# Allegro board CN0522 Allegro Layout File.brd
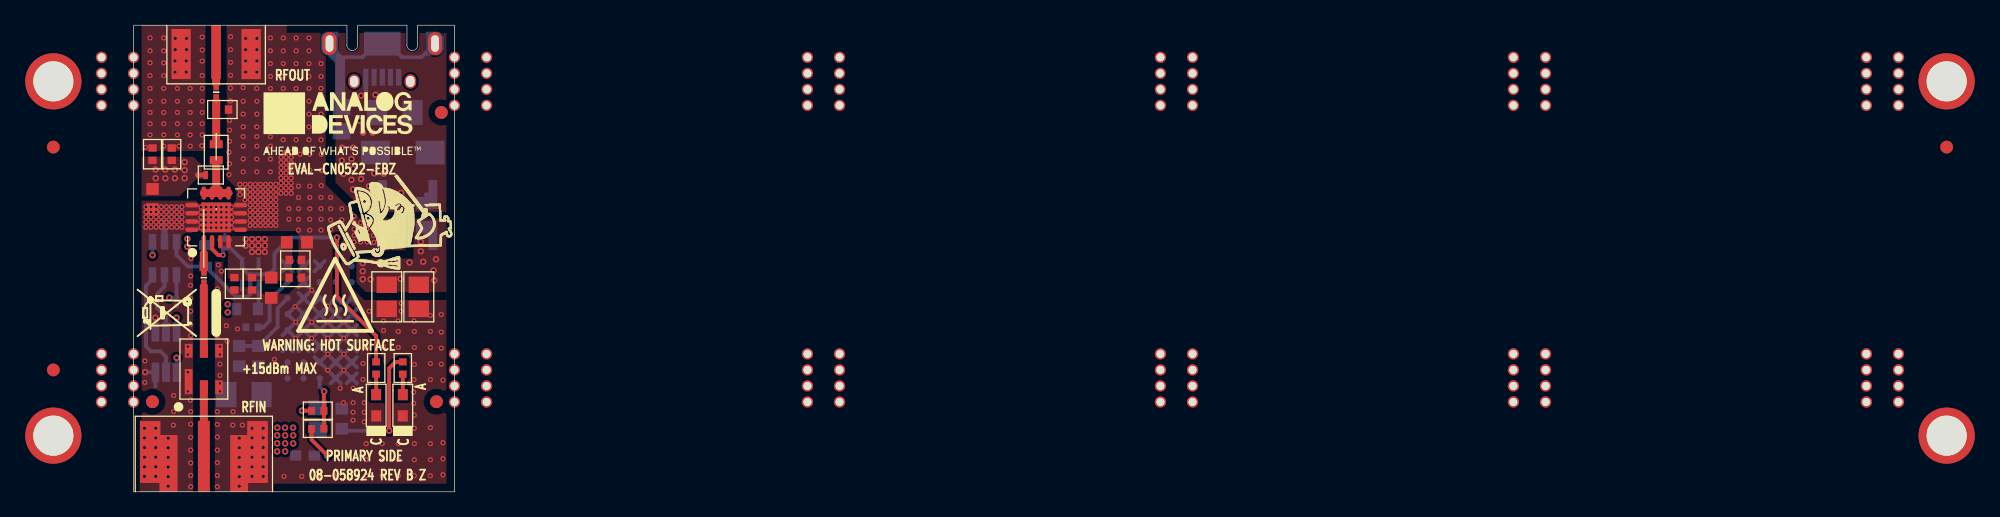
[diagram p0: board, top side]
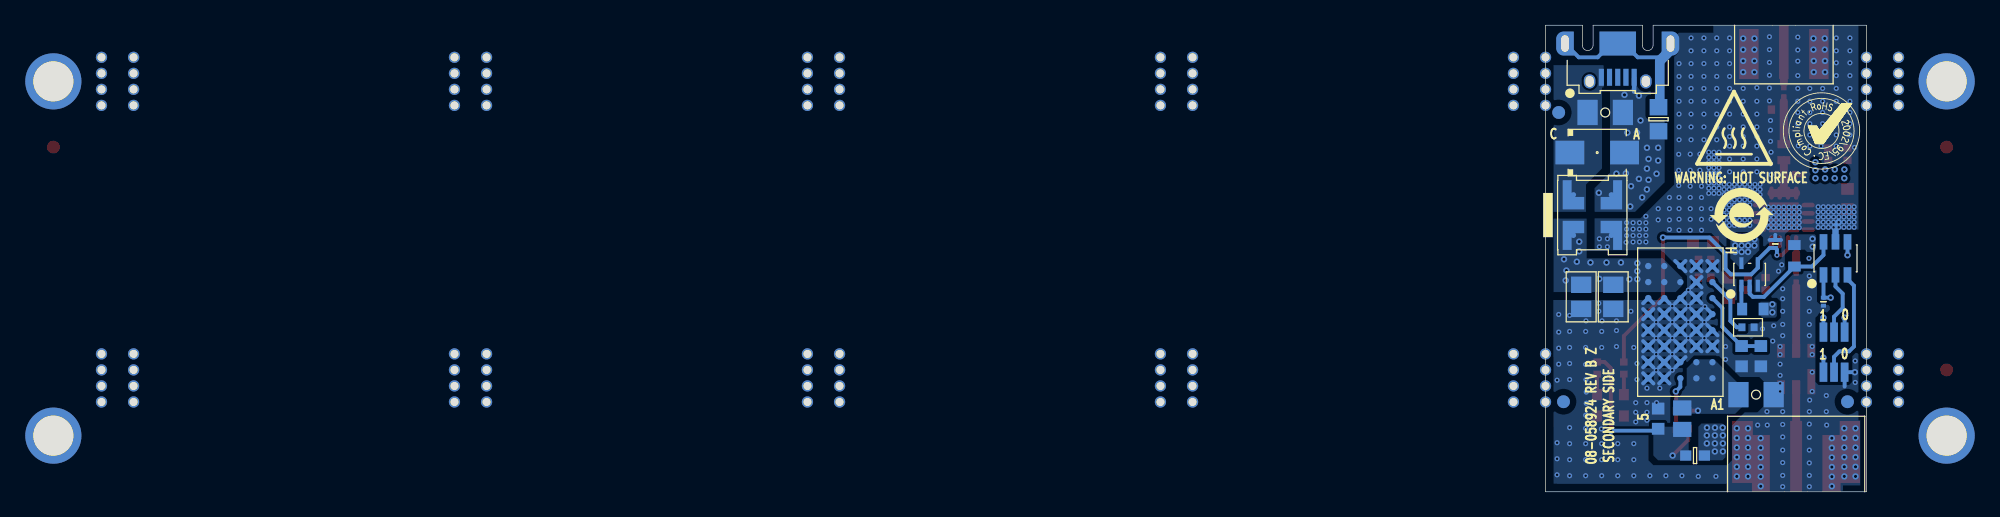
[diagram p1: board, bottom side, seen from below]

Outline 25.4 x 36.96 mm; copper layers: TOP, L2_GND, L3_GND, L4_PWR, L5_GND, BOTTOM. Coordinates in mm from the lower left corner of the outline.
Outline path: 0,36.96 16.88,36.96 16.88,35.38 arc(17.31,34.96) 17.74,35.38 17.74,36.96 21.63,36.96 21.63,35.38 arc(22.06,34.96) 22.49,35.38 22.49,36.96 25.4,36.96 25.4,0 0,0 0,36.96

## Design rules (mm)
constraint set DEFAULT: min track width 0.203

## Placement (name value [footprint] x y rotation side)
C1  100pF  [C0201]  5.56 16.96 90 top
C2  10uF  [C0603]  10.9 16.16 270 top
C3  0.01UF  [C0402]  9.37 16.47 270 top
C4  100pF  [C0402]  7.98 16.47 270 top
C5  10pF  [C0201]  7.21 19.63 90 bottom
C6  10uF  [C0603]  12.93 19.76 0 top
C7  0.01UF  [C0402]  12.8 18.36 0 top
C8  100pF  [C0402]  12.8 16.96 0 top
C9  100pF  [C0402]  3.02 26.74 90 top
C10  0.01UF  [C0402]  1.5 26.74 90 top
C11  10uF  [C0603]  1.5 23.19 270 top
C12  8PF  [C0402]  7.03 30.28 0 top
C13  100pF  [C0201]  6.54 31.65 90 top
C14  0.1uF  [C0201]  3.4 15.06 270 bottom
C15  47UF  [C1206H71]  20.68 30.05 180 bottom
C16  0.1UF  [C0805H53]  20.04 15.44 270 top
C17  0.1UF  [C0805H53]  22.58 15.44 270 top
C18  0.1UF  [C0805H53]  22.58 15.44 270 bottom
C19  4.7UF  [C0805H53]  20.04 15.44 270 bottom
C20  1UF  [C0603]  9.88 10.74 270 bottom
C21  1UF  [C0603]  8.36 10.74 270 bottom
C22  100uF  [C1206H71]  8.74 7.69 180 bottom
C23  1UF  [C0603]  16.48 5.79 90 bottom
D1  SMAJ5.0A-13-F  [DIOSMJ5_0]  21.31 26.87 180 bottom
DS1  SML-D12U1WT86  [LED0603_A]  19.2 6.85 90 top
DS2  LTST-C191KGKT  [LED0603_A]  21.31 6.85 90 top
E1  600OHM AT 100MEGHZ  [L0603]  13.56 2.87 180 bottom
FL1  915MEGHZ  [DCC6C]  5.56 9.73 0 top
J1  132365-10  [CNSMARAL686W375H177]  5.56 0 270 top
J2  CON-SMA-EDGE-S  [CNSMARAL525W250H148]  6.53 36.96 90 top
JP1  3PIN_SOLDER_JUMPER  [JPRSLD03]  2.57 9.47 0 bottom
JP2  3PIN_SOLDER_JUMPER  [JPRSLD03]  2.57 12.65 180 bottom
L1  18nH  [L0402-2]  6.12 25.09 180 top
L2  1.6nH  [L7144]  6.54 26.9 90 top
L3  800OHMS AT 100MEGHZ  [L2020_A]  21.69 21.92 270 bottom
L4  1uH  [L0805]  14.58 5.79 270 bottom
NOREF  -  [unnamed]  81.28 30.61 0 top
NOREF#2  -  [#2]  52.32 200.91 90 top
NOREF#3  -  [unnamed]  27.94 31.88 0 top
NOREF#4  -  [unnamed]  53.34 7.11 0 top
NOREF#5  -  [#2]  26.92 237.87 0 top
NOREF#6  -  [#2]  53.34 0 0 top
NOREF#7  -  [unnamed]  111.76 7.11 0 top
NOREF#8  -  [#2]  43.81 237.87 0 top
NOREF#9  -  [unnamed]  55.88 34.42 0 top
NOREF#10  -  [unnamed#2]  -6.35 27.3 0 top
NOREF#11  -  [#2]  -85.24 -81.42 0 top
NOREF#12  -  [unnamed]  109.22 30.61 0 top
NOREF#13  -  [unnamed]  139.7 10.92 0 top
NOREF#14  -  [#2]  16.2 29.14 0 top
NOREF#15  -  [unnamed]  -2.54 33.15 0 top
NOREF#16  -  [unnamed]  137.16 31.88 0 top
NOREF#17  -  [#2]  43.39 234.31 0 top
NOREF#18  -  [unnamed]  0 30.61 0 top
NOREF#19  -  [#2]  49.41 237.87 0 top
NOREF#20  -  [#2]  -69.38 316.18 0 top
NOREF#21  -  [unnamed]  25.4 30.61 0 top
NOREF#22  -  [unnamed]  0 34.42 0 top
NOREF#23  -  [unnamed]  109.22 7.11 0 top
NOREF#24  -  [#2]  -6.35 4.45 0 top
NOREF#25  -  [unnamed]  81.28 9.65 0 top
NOREF#26  -  [#2]  -10.16 0 0 top
NOREF#27  -  [unnamed]  25.4 33.15 0 top
NOREF#28  -  [unnamed#2]  23.98 7.13 0 top
NOREF#29  -  [unnamed]  -2.54 31.88 0 top
NOREF#30  -  [unnamed]  -2.54 9.65 0 top
NOREF#31  -  [unnamed]  -6.35 4.45 0 top
NOREF#32  -  [unnamed]  27.94 10.92 0 top
NOREF#33  -  [#2]  52.32 200.91 0 top
NOREF#34  -  [#2]  44.66 237.87 0 top
NOREF#35  -  [unnamed]  137.16 7.11 0 top
NOREF#36  -  [#2]  207.17 225.23 90 top
NOREF#37  -  [unnamed]  53.34 33.15 0 top
NOREF#38  -  [unnamed]  53.34 8.38 0 top
NOREF#39  -  [#2]  28.42 208.05 0 top
NOREF#40  -  [unnamed]  81.28 10.92 0 top
NOREF#41  -  [unnamed]  0 7.11 0 top
NOREF#42  -  [#2]  0 0 0 top
NOREF#43  -  [#2]  25.4 0 0 top
NOREF#44  -  [#2]  203.49 231.15 90 top
NOREF#45  -  [unnamed]  0 10.92 0 top
NOREF#46  -  [unnamed]  27.94 34.42 0 top
NOREF#47  -  [unnamed]  53.34 34.42 0 top
NOREF#48  -  [unnamed]  109.22 34.42 0 top
NOREF#49  -  [unnamed]  81.28 34.42 0 top
NOREF#50  -  [unnamed]  27.94 9.65 0 top
NOREF#51  -  [#2]  198.77 195.59 90 top
NOREF#52  -  [unnamed]  137.16 10.92 0 top
NOREF#53  -  [unnamed]  139.7 34.42 0 top
NOREF#54  -  [unnamed]  -2.54 10.92 0 top
NOREF#55  -  [#2]  147.32 0 0 top
NOREF#56  -  [#2]  18.41 36.96 180 top
NOREF#57  -  [unnamed]  55.88 9.65 0 top
NOREF#58  -  [unnamed#3]  -6.35 32.51 0 top
NOREF#59  -  [unnamed]  139.7 30.61 0 top
NOREF#60  -  [#2]  1.22 27.55 0 top
NOREF#61  -  [unnamed]  137.16 9.65 0 top
NOREF#62  -  [unnamed]  83.82 10.92 0 top
NOREF#63  -  [unnamed]  83.82 9.65 0 top
NOREF#64  -  [unnamed]  109.22 9.65 0 top
NOREF#65  -  [#2]  0 0 0 top
NOREF#66  -  [#2]  190.11 225.26 0 top
NOREF#67  -  [unnamed]  137.16 33.15 0 top
NOREF#68  -  [unnamed]  83.82 30.61 0 top
NOREF#69  -  [#2]  211.92 193.93 0 top
NOREF#70  -  [unnamed]  139.7 31.88 0 top
NOREF#71  -  [unnamed]  55.88 10.92 0 top
NOREF#72  -  [#2]  -2.54 0 0 top
NOREF#73  -  [#2]  18.41 0 90 top
NOREF#74  -  [unnamed]  111.76 31.88 0 top
NOREF#75  -  [unnamed#2]  -6.35 9.65 0 top
NOREF#76  -  [unnamed#2]  143.51 27.3 0 top
NOREF#77  -  [unnamed]  83.82 34.42 0 top
NOREF#78  -  [#2]  83.82 0 0 top
NOREF#79  -  [unnamed]  0 8.38 0 top
NOREF#80  -  [unnamed]  0 33.15 0 top
NOREF#81  -  [unnamed]  111.76 34.42 0 top
NOREF#82  -  [unnamed]  83.82 8.38 0 top
NOREF#83  -  [unnamed]  25.4 34.42 0 top
NOREF#84  -  [unnamed]  111.76 30.61 0 top
NOREF#85  -  [unnamed]  139.7 9.65 0 top
NOREF#86  -  [unnamed]  25.4 8.38 0 top
NOREF#87  -  [unnamed]  25.4 7.11 0 top
NOREF#88  -  [unnamed]  139.7 33.15 0 top
NOREF#89  -  [#2]  -10.16 36.96 0 top
NOREF#90  -  [#2]  55.88 0 0 top
NOREF#91  -  [unnamed]  109.22 33.15 0 top
NOREF#92  -  [#2]  26.92 200.91 0 top
NOREF#93  -  [unnamed]  139.7 7.11 0 top
NOREF#94  -  [#2]  26.92 237.87 0 top
NOREF#95  -  [unnamed]  109.22 8.38 0 top
NOREF#96  -  [#2]  81.28 0 0 top
NOREF#97  -  [unnamed]  55.88 30.61 0 top
NOREF#98  -  [#2]  -10.16 0 0 top
NOREF#99  -  [#2]  139.7 0 0 top
NOREF#100  -  [unnamed#2]  24.36 30.05 0 top
NOREF#101  -  [#2]  190.11 184.7 0 top
NOREF#102  -  [unnamed]  27.94 8.38 0 top
NOREF#103  -  [unnamed]  55.88 8.38 0 top
NOREF#104  -  [unnamed]  81.28 33.15 0 top
NOREF#105  -  [#2]  -26.51 208.38 0 top
NOREF#106  -  [unnamed]  109.22 10.92 0 top
NOREF#107  -  [#2]  26.92 200.91 0 top
NOREF#108  -  [unnamed]  111.76 8.38 0 top
NOREF#109  -  [#2]  0 36.96 270 top
NOREF#110  -  [unnamed]  53.34 10.92 0 top
NOREF#111  -  [unnamed]  25.4 10.92 0 top
NOREF#112  -  [unnamed]  27.94 7.11 0 top
NOREF#113  -  [unnamed]  83.82 7.11 0 top
NOREF#114  -  [#2]  15.34 52.02 0 top
NOREF#115  -  [unnamed]  -2.54 34.42 0 top
NOREF#116  -  [unnamed]  81.28 31.88 0 top
NOREF#117  -  [#2]  137.16 0 0 top
NOREF#118  -  [unnamed]  55.88 31.88 0 top
NOREF#119  -  [#2]  6.86 13.97 90 top
NOREF#120  -  [unnamed]  111.76 9.65 0 top
NOREF#121  -  [unnamed]  55.88 33.15 0 top
NOREF#122  -  [unnamed]  0 9.65 0 top
NOREF#123  -  [#2]  194.67 114.19 0 top
NOREF#124  -  [#2]  -85.24 -81.42 0 top
NOREF#125  -  [unnamed]  55.88 7.11 0 top
NOREF#126  -  [unnamed#3]  143.51 32.51 0 top
NOREF#127  -  [unnamed]  53.34 9.65 0 top
NOREF#128  -  [unnamed]  27.94 33.15 0 top
NOREF#129  -  [unnamed]  25.4 31.88 0 top
NOREF#130  -  [unnamed]  81.28 8.38 0 top
NOREF#131  -  [#2]  28.42 208.05 0 top
NOREF#132  -  [#2]  -85.24 -81.42 0 top
NOREF#133  -  [unnamed]  111.76 10.92 0 top
NOREF#134  -  [unnamed]  53.34 30.61 0 top
NOREF#135  -  [unnamed]  83.82 31.88 0 top
NOREF#136  -  [unnamed]  137.16 34.42 0 top
NOREF#137  -  [#2]  27.94 0 0 top
NOREF#138  -  [unnamed]  0 31.88 0 top
NOREF#139  -  [unnamed]  137.16 30.61 0 top
NOREF#140  -  [unnamed]  111.76 33.15 0 top
NOREF#141  -  [unnamed]  81.28 7.11 0 top
NOREF#142  -  [unnamed]  109.22 31.88 0 top
NOREF#143  -  [#2]  109.22 0 0 top
NOREF#144  -  [unnamed]  27.94 30.61 0 top
NOREF#145  -  [unnamed]  -2.54 8.38 0 top
NOREF#146  -  [unnamed#2]  1.5 7.13 0 top
NOREF#147  -  [#2]  -3.73 90.19 0 top
NOREF#148  -  [#2]  -6.35 4.45 0 top
NOREF#149  -  [unnamed]  139.7 8.38 0 top
NOREF#150  -  [unnamed]  -2.54 7.11 0 top
NOREF#151  -  [unnamed]  25.4 9.65 0 top
NOREF#152  -  [unnamed#3]  143.51 4.45 0 top
NOREF#153  -  [#2]  111.76 0 0 top
NOREF#154  -  [unnamed]  83.82 33.15 0 top
NOREF#155  -  [unnamed]  -2.54 30.61 0 top
NOREF#156  -  [#2]  201.13 227.54 0 top
NOREF#157  -  [#2]  48.56 237.87 0 top
NOREF#158  -  [unnamed]  53.34 31.88 0 top
NOREF#159  -  [unnamed]  137.16 8.38 0 top
NOREF#160  -  [#2]  201.13 213.37 0 top
NOREF#161  -  [unnamed#2]  24.36 30.05 180 bottom
NOREF#162  -  [#2]  9.88 21.92 180 bottom
NOREF#163  -  [unnamed#2]  23.98 7.13 180 bottom
NOREF#164  -  [unnamed#2]  1.5 7.13 180 bottom
P1  47590-0001  [CNMOLEX47590-0001]  19.69 36.96 270 bottom
R1  1K  [R0603]  5.7 18.69 270 bottom
R2  0  [R0603]  8.99 14.47 0 bottom
R3  365  [R0402]  19.2 9.8 270 top
R4  1K  [R0805]  16.46 29.51 270 bottom
R5  115K  [R0402]  9.37 13.03 180 bottom
R6  60.4K  [R0402]  14.58 6.42 180 top
R7  182K  [R0402]  14.58 4.99 180 top
R8  301  [R0402]  21.31 9.8 270 top
U1  ADL5605ACPZ  [QFN16_4X4_PAD2_36X2_36]  6.54 21.74 0 top
U2  ADT6402SRJZ  [TSOT23_6]  2.45 18.49 180 bottom
U3  74AHCT1G126SE-7  [SOT353]  9.25 17.22 180 bottom
U4  LTM8045MPY#PBF  [BGA40]  14.73 13.43 90 bottom

## Library data of the parts
C1 C13 = CAP: Tolerance: 5; User Part Number: UPN; alternate symbols: (); part number: CAP_SM-100PF,50V,5,E023045,C0201; tolerance: 5
C2 C6 C11 = CAP: User Part Number: UPN; Tolerance: 20; alternate symbols: (); part number: CAP_SM-10UF,6.3V,20,E007143,C0603; tolerance: 20
C3 C7 C10 = CAP: Tolerance: 10; User Part Number: UPN; alternate symbols: (); part number: CAP_SM-0.01UF,25V,10,E007203,C0402; tolerance: 10
C4 C8 C9 = CAP: Tolerance: 5; User Part Number: UPN; alternate symbols: (); part number: CAP_SM-100PF,50V,5,E024302,C0402; tolerance: 5
C5 = CAP: Tolerance: 5; User Part Number: UPN; alternate symbols: (C0201NC); part number: CAP_SM-10PF,25V,5,E022849,C0201; tolerance: 5
C12 = CAP: Tolerance: 0.5PF; User Part Number: UPN; alternate symbols: (); part number: CAP_SM-8PF,16V,0.5PF,E026830,C0402; tolerance: 0.5PF
C14 = CAP: Tolerance: 10; User Part Number: UPN; alternate symbols: (); part number: CAP_SM-0.1UF,6.3V,10,E011567,C0201; tolerance: 10
C15 = CAP: Tolerance: 20; User Part Number: UPN; alternate symbols: (); part number: CAP_SM-47UF,10V,20,E028092,C1206H71; tolerance: 20
C16-C18 = CAP: Tolerance: 10; User Part Number: UPN; alternate symbols: (); part number: CAP_SM-0.1UF,50V,10,E033336,C0805H53; tolerance: 10
C19 = CAP: Tolerance: 10; User Part Number: UPN; alternate symbols: (); part number: CAP_SM-4.7UF,25V,10,E025752,C0805H53; tolerance: 10
C20 C21 C23 = CAP: User Part Number: UPN; Tolerance: 10; alternate symbols: C0603L_ALT; part number: CAP_SM-1UF,25V,10,E033832,C0603; tolerance: 10
C22 = CAP: Tolerance: 20; User Part Number: UPN; alternate symbols: (); part number: CAP_SM-100UF,6.3V,20,E016591,C1206H71; tolerance: 20
D1 = DIO: Tolerance: N/A; User Part Number: UPN; alternate symbols: (); part number: DIO_SM-SMAJ5.0A-13-F,5V,N/A,E001108,DIOSMJ5_0; tolerance: N/A
DS1 = DIOLED: User Part Number: UPN; Tolerance: N/A; alternate symbols: (); part number: DIOLED_SM-SML-D12U1WT86,2.2V,N/A,E037111,LED0603_A; tolerance: N/A
DS2 = DIOLED: User Part Number: UPN; Tolerance: N/A; alternate symbols: (); part number: DIOLED_SM-LTST-C191KGKT,2V,N/A,E033001,LED0603_A; tolerance: N/A
E1 = FERRITE: Tolerance: 25; User Part Number: UPN; alternate symbols: (); part number: FERRITE_SM-600OHM AT 100MEGHZ,25,E028908,L0603; tolerance: 25
FL1 = FLTRSAW6P_V2: Tolerance: N/A; User Part Number: UPN; alternate symbols: (); part number: FLTRSAW6P_V2_SM-915MEGHZ,E029797,DCC6C; tolerance: N/A
J1 = CNBNC5P: alternate symbols: (CNSMARAL686W375H177_CNSMARAL535W256H152); part number: CNBNC5P_SM-132365-10,E033180,CNSMARAL686W375H177; tolerance: N/A
J2 = CNBNC5P: Tolerance: N/A; User Part Number: UPN; alternate symbols: (); part number: CNBNC5P_SM-CON-SMA-EDGE-S,E028678,CNSMARAL525W250H148; tolerance: N/A
JP1 JP2 = NC3P_JMPR: Tolerance: N/A; User Part Number: UPN; alternate symbols: (); part number: NC3P_JMPR_SM-3PIN_SOLDER_JUMPER,E005606,JPRSLD03; tolerance: N/A
L1 = IND: Tolerance: 5; User Part Number: UPN; alternate symbols: (); part number: IND_SM-18NH,5,E012518,L0402-2; tolerance: 5
L2 = IND: Tolerance: 5; User Part Number: UPN; alternate symbols: (); part number: IND_SM-1.6NH,5,E006384,L7144; tolerance: 5
L3 = CHOKE4P: User Part Number: UPN; Tolerance: N/A; alternate symbols: (); part number: CHOKE4P_SM-800OHMS AT 100MEGHZ,N/A,E027130,L2020_A; tolerance: N/A
L4 = IND: User Part Number: UPN; Tolerance: 20; alternate symbols: (L0805L); part number: IND_SM-1UH,20,E010399,L0805; tolerance: 20
P1 = CN5P_3SHLD: User Part Number: UPN; Tolerance: N/A; alternate symbols: (); part number: CN5P_3SHLD_SM-47590-0001,E015753,CNMOLEX47590-0001; tolerance: N/A
R1 = RES: User Part Number: UPN; Tolerance: 1; alternate symbols: (R0603L); part number: RES_SM-1K,E003678,1/10W,1,R0603; tolerance: 1
R2 = RES: User Part Number: UPN; Tolerance: 5; alternate symbols: (R0603L); part number: RES_SM-0,E006826,1/10W,5,R0603; tolerance: 5
R3 = RES: Tolerance: 1; User Part Number: UPN; alternate symbols: (R0402L); part number: RES_SM-365,E028356,1/10W,1,R0402; tolerance: 1
R4 = RES: Tolerance: 1; User Part Number: UPN; alternate symbols: (R0805L); part number: RES_SM-1K,E023448,1/3W,1,R0805; tolerance: 1
R5 = RES: Tolerance: 1; User Part Number: UPN; alternate symbols: (R0402L); part number: RES_SM-115K,E025179,1/10W,1,R0402; tolerance: 1
R6 = RES: Tolerance: 1; User Part Number: UPN; alternate symbols: (R0402L); part number: RES_SM-60.4K,E022436,1/10W,1,R0402; tolerance: 1
R7 = RES: Tolerance: 1; User Part Number: UPN; alternate symbols: (R0402L); part number: RES_SM-182K,E025180,1/10W,1,R0402; tolerance: 1
R8 = RES: Tolerance: 1; User Part Number: UPN; alternate symbols: (R0402L); part number: RES_SM-301,E011195,1/16W,1,R0402; tolerance: 1
U1 = ADL5605: User Part Number: UPN; Tolerance: N/A; alternate symbols: (); part number: ADL5605_SM-ADL5605ACPZ,E026150,QFN16_4X4_PAD2_36X2_36; tolerance: N/A
U2 = ADT6402: User Part Number: UPN; Tolerance: N/A; alternate symbols: (); part number: ADT6402_SM-ADT6402SRJZ,E035980,TSOT23_6; tolerance: N/A
U3 = 741G126: User Part Number: UPN; Tolerance: N/A; alternate symbols: (); part number: 741G126_SM-74AHCT1G126SE-7,E0371122,SOT353; tolerance: N/A
U4 = LINLTM8045: Tolerance: N/A; User Part Number: UPN; alternate symbols: (); part number: LINLTM8045_SM-LTM8045MPY#PBF,E028897,BGA40; tolerance: N/A

## Footprints (pads in the part's own frame, mm; a bottom-side part is the same pattern mirrored in y, then rotated)
BGA40
  round 0.508 smd: A1(-4.445,-2.54) A2(-4.445,-1.27) A3(-4.445,0) A4(-4.445,1.27) A5(-4.445,2.54) B1(-3.175,-2.54) B2(-3.175,-1.27) B3(-3.175,0) B4(-3.175,1.27) B5(-3.175,2.54) C1(-1.905,-2.54) C2(-1.905,-1.27) C3(-1.905,0) C4(-1.905,1.27) C5(-1.905,2.54) D1(-0.635,-2.54) D2(-0.635,-1.27) D3(-0.635,0) D4(-0.635,1.27) D5(-0.635,2.54) E1(0.635,-2.54) E2(0.635,-1.27) E3(0.635,0) E4(0.635,1.27) E5(0.635,2.54) F1(1.905,-2.54) F2(1.905,-1.27) F3(1.905,0) F4(1.905,1.27) F5(1.905,2.54) G1(3.175,-2.54) G2(3.175,-1.27) G3(3.175,0) G4(3.175,1.27) G5(3.175,2.54) H1(4.445,-2.54) H2(4.445,-1.27) H3(4.445,0) H4(4.445,1.27) H5(4.445,2.54)
C0201
  rect 0.305x0.406 smd: 1(-0.318,0) 2(0.318,0)
C0402
  rect 0.584x0.66 smd: 1(-0.49,0) 2(0.49,0)
C0603
  rect 0.94x0.991 smd: 1(-0.8,0) 2(0.8,0)
C0805H53
  rect 1.295x1.6 smd: 1(-0.953,0) 2(0.953,0)
C1206H71
  rect 1.6x2.007 smd: 1(-1.397,0) 2(1.397,0)
CNMOLEX47590-0001
  oval 1.118x0.914 hole 0.864x0.66: (4.45,-2.225) (4.45,2.225)
  rect 1.346x0.406 smd: 1(4.123,-1.3) 2(4.123,-0.65) 3(4.123,0) 4(4.123,0.65) 5(4.123,1.3)
  oval 1.803x1.118 hole 1.295x0.61: SH1(1.45,4.175) SH3(1.45,-4.175)
  rect 1.905x2.896 smd: SH2(1.45,0)
CNSMARAL525W250H148
  rect 4.242x0.762 smd: 1(-2.121,0)
  rect 3.962x1.499 smd: 2(-2.281,2.77) 3(-2.281,2.77) 4(-2.281,-2.77) 5(-2.281,-2.77)
CNSMARAL686W375H177
  rect 5.613x0.94 smd: 1(-2.807,0)
  custom 5.603x2.949 smd: 2(-2.801,3.576) 3(-2.801,-3.576) 4(-2.801,3.576) 5(-2.801,-3.576)
DCC6C
  rect 0.61x2.007 smd: 1(-1.205,-1.003)
  rect 0.61x1.092 smd: 2(0,-1.446) 3(1.205,-1.446) 4(1.205,1.446) 5(0,1.446) 6(-1.205,1.446)
DIOSMJ5_0
  rect 2.286x1.88 smd: A(2.164,0) C(-2.164,0)
JPRSLD03
  rect 0.61x1.524 smd: 1(-0.838,0) 2(0,0) 3(0.838,0)
L0402-2
  rect 0.381x0.66 smd: 1(-0.419,0) 2(0.419,0)
L0603
  rect 0.889x0.813 smd: 1(-0.737,0) 2(0.737,0)
L0805
  rect 1.194x1.448 smd: 1(-0.85,0) 2(0.85,0)
L2020_A
  custom 2.311x1.702 smd: 1(-1.606,-1.501) 2(1.606,-1.501) 3(1.606,1.501) 4(-1.606,1.501)
L7144
  rect 0.635x1.016 smd: 1(-0.635,0) 2(0.635,0)
LED0603_A
  rect 0.889x0.787 smd: A(0.845,0) C(-0.845,0)
QFN16_4X4_PAD2_36X2_36
  oval 0.356x1.041 smd: 1(-0.975,-1.925) 2(-0.325,-1.925) 3(0.325,-1.925) 4(0.975,-1.925) 9(0.975,1.925) 10(0.325,1.925) 11(-0.325,1.925) 12(-0.975,1.925)
  oval 1.041x0.356 smd: 5(1.925,-0.975) 6(1.925,-0.325) 7(1.925,0.325) 8(1.925,0.975) 13(-1.925,0.975) 14(-1.925,0.325) 15(-1.925,-0.325) 16(-1.925,-0.975)
  rect 2.362x2.362 smd: PAD(0,0)
R0402
  rect 0.559x0.61 smd: 1(-0.483,0) 2(0.483,0)
R0603
  rect 0.787x0.991 smd: 1(-0.85,0) 2(0.85,0)
R0805
  rect 1.295x1.397 smd: 1(-0.953,0) 2(0.953,0)
SOT353
  rect 0.33x0.94 smd: 1(-0.65,-0.89) 2(0,-0.89) 3(0.65,-0.89) 4(0.65,0.89) 5(-0.65,0.89)
TSOT23_6
  rect 0.61x1.219 smd: 1(-0.95,-1.31) 2(0,-1.31) 3(0.95,-1.31) 4(0.95,1.31) 5(0,1.31) 6(-0.95,1.31)
unnamed
  round 0.889 hole 0.635 unplated: (0,0)
unnamed#2
  round 1.016 smd: (0,0)
unnamed#3
  round 4.445 hole 3.175 unplated: (0,0)

## Nets
5V_SUPPLY: C2.1 C3.1 C4.1 C6.1 C7.1 C8.1 C9.1 C10.1 C11.1 C14.1 E1.2(N2) JP1.3 JP2.1 L1.2(N2) R1.1 R2.1 U1.3(VCC) U1.4 U2.1 U2.4(VCC) U3.5
GND: C2.2(N2) C3.2(N2) C4.2(N2) C5.2(N2) C6.2(N2) C7.2(N2) C8.2(N2) C9.2(N2) C10.2(N2) C11.2(N2) C12.2(N2) C14.2(N2) C16.2(N2) C17.2(N2) C18.2(N2) C19.2(N2) C20.2(N2) C21.2(N2) C22.2(N2) C23.2(N2) DS1.C DS2.C FL1.1 FL1.3 FL1.4 FL1.6 J1.2 J1.3 J1.4 J1.5(SH4) J2.2 J2.3 J2.4 J2.5(SH4) JP1.1 JP2.3 L3.3 R5.2(N2) U1.5 U1.6 U1.7 U1.8 U1.13 U1.14 U1.15 U1.16 U1.PAD U2.5 U3.3 U4.A4 U4.A5 U4.B3 U4.B4 U4.B5(VOUT-_4) U4.C1 U4.C2 U4.C3 U4.C4 U4.C5 U4.D1 U4.D2 U4.D3 U4.D4 U4.D5 U4.E1 U4.E2 U4.E3 U4.E4 U4.E5 U4.F2 U4.F3 U4.F4 U4.F5 U4.G2 U4.H1 U4.H2 U4.H3
PGND: C15.2(N2) D1.A(P) L3.4(N4) P1.5 R4.2(N2)
ADL5605_DISABLE: C5.1 R3.1 U1.2 U3.4(Y)
UNNAMED_3_CAP_I19_N1: C23.1 E1.1 L4.2(N2) R7.2(N2) R8.1
UNNAMED_3_CAP_I23_N1: C22.1 L4.1 R6.2(N2) U4.A1 U4.A2 U4.B1 U4.B2
UNNAMED_3_CAP_I30_N1: C20.1 C21.1 U4.F1
UNNAMED_3_CAP_I36_N1: C16.1 C17.1 C18.1 C19.1 L3.2 U4.G3 U4.G4 U4.G5 U4.H4 U4.H5
UNNAMED_3_CAP_I45_N1: C15.1 D1.C L3.1 P1.1
UNNAMED_3_CN5P3SHLD_I52_N6: P1.SH1 P1.SH2 P1.SH3(N8) R4.1
UNNAMED_3_DIOLED_I57_P: DS2.A(P) R8.2(N2)
UNNAMED_3_LINLTM8045_I26_FB: R6.1 R7.1 U4.A3
UNNAMED_3_LINLTM8045_I26_RT: R5.1 U4.G1
UNNAMED_4_741G126_I114_A: R1.2(N2) U2.6 U3.2
UNNAMED_4_741G126_I114_OE: R2.2(N2) U3.1
UNNAMED_4_ADL5605_I25_RFIN: C1.2(N2) U1.1
UNNAMED_4_ADL5605_I25_RFOUT1: L1.1 L2.1 U1.9 U1.10 U1.11 U1.12
UNNAMED_4_ADT6402_I117_S0: JP1.2(COM) U2.3
UNNAMED_4_ADT6402_I117_S1: JP2.2(COM) U2.2
UNNAMED_4_CAP_I17_N2: C13.2(N2) J2.1
UNNAMED_4_CAP_I29_N1: C12.1 C13.1 L2.2(N2)
UNNAMED_4_CAP_I106_N1: C1.1 FL1.5(OUTPUT)
UNNAMED_4_CNBNC5P_I36_CNTR: FL1.2 J1.1
UNNAMED_4_DIOLED_I108_P: DS1.A(P) R3.2(N2)

Pads without a net: P1 2 3 4

## Via types
v1: diameter 0.508, hole 0.254, TOP to BOTTOM, 132 vias
v2: diameter 0.406, hole 0.203, TOP to BOTTOM, 463 vias

## Routing (per net, layer and track width the routed paths; a pad name or vN(x,y) marks a point on that pad's centre or on a via; arc(x,y) is an arc through that point)
5V_SUPPLY: length 6.4
  TOP w0.381: L1.2 5.05,25.09
  BOTTOM w0.305: v1(2.83,15.38) C14.1 3.4,15.38 U2.1 ; U2.4 v1(1.5,18.74) ; JP1.3 v1(3.4,10.61) ; JP2.1 v1(3.4,13.79)
  vias: v1(1.74,25.53) v1(1.75,24.84) v1(2.51,25.53) v1(2.51,24.84) v1(3.27,25.53) v1(3.28,24.84) v1(4.04,26.11) v1(4.04,25.47) v1(4.04,24.84) v1(4.27,20.04) v1(4.25,19.42) v1(7.45,14.85) v1(7.45,14.21) v1(8.86,20.01) v1(8.86,19.5) v1(9.37,20.01) v1(9.37,19.5) v1(9.37,19) v1(9.88,20.01) v1(9.88,19.5) v1(9.88,19) v1(10.39,20.01) v1(10.39,19.5) v1(10.39,19) v1(11.38,5.08) v1(11.36,4.46) v1(11.36,3.83) v1(11.36,3.19) v1(11.99,5.08) v1(12,4.46) v1(12,3.83) v1(12,3.19) v1(12.62,5.08) v1(12.63,4.46) v1(12.63,3.83)
GND: length 65.3
  BOTTOM w0.305: U4.C3 15.14,11.12 ; U4.C3 14.32,11.12 ; U4.C3 14.32,11.94 ; U4.C3 15.14,11.94 ; U4.H1 12.6,17.47 ; U4.H1 12.6,18.29 ; U4.H1 11.78,17.47 ; U4.H1 11.78,18.29 ; 16.86,14.48 U4.E5 ; U4.E5 17.68,14.48 ; U4.E5 16.86,13.66 ; U4.E5 17.68,13.66 ; 15.59,9.4 U4.A4 ; U4.A4 15.59,8.58 ; U4.A4 16.41,9.4 ; U4.A4 16.41,8.58 ; U4.E4 16.41,14.48 ; U4.E4 15.59,14.48 ; U4.E4 15.59,13.66 ; U4.E4 16.41,13.66 ; 15.59,11.12 U4.C4 ; U4.C4 16.41,11.94 ; U4.C4 15.59,11.94 ; U4.C4 16.41,11.12 ; U4.C2 13.87,11.12 ; U4.C2 13.87,11.94 ; U4.C2 13.05,11.94 ; U4.C2 13.05,11.12 ; U4.B3 15.14,10.67 ; U4.B3 15.14,9.85 ; U4.B3 14.32,10.67 ; 15.59,10.67 U4.B4 ; U4.B4 16.41,9.85 ; U4.B4 16.41,10.67 ; U4.B4 15.59,9.85 ; 13.05,14.48 U4.E2 ; U4.E2 13.87,14.48 ; U4.E2 13.05,13.66 ; U4.E2 13.87,13.66 ; U4.H3 15.14,18.29 ; U4.H3 14.32,17.47 ; U4.H3 14.32,18.29 ; 13.05,18.29 U4.H2 ; U4.H2 13.05,17.47 ; U4.H2 13.87,18.29 ; U4.H2 13.87,17.47 ; U4.C5 17.68,11.94 ; U4.C5 17.68,11.12 ; U4.C5 16.86,11.12 ; U4.C5 16.86,11.94 ; U4.D2 13.87,13.21 ; U4.D2 13.87,12.39 ; U4.D2 13.05,12.39 ; U4.D2 13.05,13.21 ; 17.68,14.93 U4.F5 16.86,14.93 ; 14.32,13.21 U4.D3 ; U4.D3 15.14,13.21 ; U4.D3 15.14,12.39 ; U4.D3 14.32,12.39 ; 11.78,12.39 U4.D1 ; U4.D1 12.6,12.39 ; U4.D1 12.6,13.21 ; 16.86,9.85 U4.B5 ; U4.B5 16.86,10.67 ; U4.B5 17.68,10.67 ; U4.B5 17.68,9.85 ; v1(0.91,9.47) JP1.1 1.73,8.33 ; 16.86,13.21 U4.D5 ; U4.D5 17.68,12.39 ; U4.D5 16.86,12.39 ; U4.D5 17.68,13.21 ; U4.E3 15.14,14.48 ; U4.E3 15.14,13.66 ; U4.E3 14.32,14.48 ; U4.E3 14.32,13.66 ; U4.D4 16.41,13.21 ; U4.D4 15.59,12.39 ; U4.D4 15.59,13.21 ; U4.D4 16.41,12.39 ; 6.76,19.95 C5.2 ; C5.2 7.21,20.36 ; C5.2 7.67,19.95 ; 16.86,8.58 U4.A5 ; U4.A5 16.86,9.4 ; U4.A5 17.68,8.58 ; U4.A5 17.68,9.4 ; U4.G2 13.87,16.2 ; U4.G2 13.05,16.2 ; U4.G2 13.05,17.02 ; U4.G2 13.87,17.02 ; U4.F2 13.87,15.75 ; U4.F2 13.87,14.93 ; U4.F2 13.05,15.75 ; U4.F2 13.05,14.93 ; 12.6,13.66 U4.E1 12.6,14.48 ; 14.32,14.93 U4.F3 ; U4.F3 15.14,14.93 ; U4.F3 14.32,15.75 ; JP2.3 v1(1.73,13.79) ; 11.78,11.94 U4.C1 ; U4.C1 11.78,11.12 ; U4.C1 12.6,11.94 ; U4.C1 12.6,11.12 ; 16.41,14.93 U4.F4 15.59,14.93
  BOTTOM w0.508: U2.5 2.45,21.1 v2(2.19,21.36)
  vias: v1(0.86,5.03) v1(0.86,4.26) v1(0.86,3.5) v1(0.86,2.74) v1(0.86,1.98) v1(0.86,1.22) v1(1.75,5.03) v1(1.75,4.26) v1(1.75,3.5) v1(1.75,2.74) v1(1.75,1.98) v1(1.75,1.22) v1(2.74,4.24) v1(2.74,3.48) v1(2.74,2.72) v1(2.74,1.96) v1(2.74,1.2) v1(2.74,0.43) v1(3.28,34.13) v1(3.28,33.24) v1(3.3,35.92) v1(3.3,35.03) v1(4.19,35.92) v1(4.19,35.03) v1(4.17,34.13) v1(4.17,33.24) v1(8.37,4.24) v1(8.37,3.48) v1(8.37,2.72) v1(8.37,1.96) v1(8.37,1.2) v1(8.37,0.43) v1(8.87,35.91) v1(8.87,35.02) v1(8.87,34.13) v1(8.87,33.24) v1(9.37,5.03) v1(9.37,4.26) v1(9.37,3.5) v1(9.37,2.74) v1(9.37,1.98) v1(9.37,1.22) v1(9.76,35.91) v1(9.76,35.02) v1(9.76,34.13) v1(9.76,33.24) v1(10.26,5.03) v1(10.26,4.26) v1(10.26,3.5) v1(10.26,2.74) v1(10.26,1.98) v1(10.26,1.22) v2(0.89,10.36) v2(0.89,8.66) v2(0.95,27.28) v2(0.97,22.57) v2(0.97,22.17) v2(0.97,21.76) v2(0.97,21.36) v2(0.97,20.95) v2(1.31,35.95) v2(1.31,34.94) v2(1.31,33.98) v2(1.31,32.97) v2(1.31,31.95) v2(1.31,30.93) v2(1.31,30.05) v2(1.31,29.16) v2(1.31,28.27) v2(1.38,22.57) v2(1.38,22.17) v2(1.38,21.76) v2(1.38,21.36) v2(1.38,20.95) v2(1.79,22.57) v2(1.79,22.17) v2(1.79,21.76) v2(1.79,21.36) v2(1.79,20.95) v2(2.19,22.57) v2(2.19,22.17) v2(2.19,21.76) v2(2.19,20.95) v2(2.39,35.95) v2(2.39,34.94) v2(2.39,33.98) v2(2.39,32.97) v2(2.39,31.95) v2(2.39,30.93) v2(2.39,30.05) v2(2.39,29.16) v2(2.39,28.27) v2(2.39,27.38) v2(2.6,22.57) v2(2.6,22.17) v2(2.6,21.76) v2(2.6,21.36) v2(2.6,20.95) v2(3.01,22.57) v2(3.01,22.17) v2(3.01,21.76) v2(3.01,21.36) v2(3.01,20.95) v2(3.18,7.62) v2(3.18,6.35) v2(3.15,5.28) v2(3.47,31.95) v2(3.47,30.93) v2(3.47,30.05) v2(3.47,29.16) v2(3.47,28.27) v2(3.41,22.57) v2(3.41,22.17) v2(3.41,21.76) v2(3.41,21.36) v2(3.41,20.95) v2(3.59,27.38) v2(3.82,22.57) v2(3.82,22.17) v2(3.82,21.76) v2(3.82,21.36) v2(3.82,20.95) v2(4.29,11.5) v2(4.29,10.87) v2(4.29,9.47) v2(4.29,7.95) v2(4.48,31.95) v2(4.48,30.93) v2(4.48,30.05) v2(4.48,29.16) v2(4.48,28.27) v2(4.48,27.38) v2(4.5,7.26) v2(4.55,18.49) v2(4.52,17.09) v2(4.51,16.35) v2(4.52,15.31) v2(4.52,14.3) v2(4.52,13.26) v2(4.52,12.37) v2(4.52,6.35) v2(4.52,5.36) v2(4.52,4.32) v2(4.52,3.3) v2(4.52,2.28) v2(4.52,1.29) v2(4.52,0.4) v2(5.39,27.41) v2(5.32,22.55) v2(5.32,22.14) v2(5.32,21.74) v2(5.32,21.33) v2(5.32,20.92) v2(5.44,36.01) v2(5.44,35) v2(5.44,34.11) v2(5.44,32.97) v2(5.44,31.95) v2(5.44,30.93) v2(5.44,30.05) v2(5.44,29.16) v2(5.44,28.27) v2(5.72,22.55) v2(5.72,22.14) v2(5.72,21.74) v2(5.72,21.33) v2(5.72,20.92) v2(6.13,22.55) v2(6.13,22.14) v2(6.13,21.74) v2(6.13,21.33) v2(6.13,20.92) v2(6.54,22.55) v2(6.54,22.14) v2(6.54,21.74) v2(6.54,21.33) v2(6.54,20.92) v2(6.63,16.08) v2(6.63,15.29) v2(6.63,14.3) v2(6.63,13.26) v2(6.63,12.37) v2(6.63,6.35) v2(6.63,5.33) v2(6.63,4.34) v2(6.63,3.3) v2(6.63,2.31) v2(6.63,1.29) v2(6.63,0.4) v2(6.71,17.98) v2(6.83,11.5) v2(6.83,10.87) v2(6.83,10.11) v2(6.83,9.22) v2(6.83,8.58) v2(6.83,7.95) v2(6.94,22.55) v2(6.94,22.14) v2(6.94,21.74) v2(6.94,21.33) v2(6.94,20.92) v2(6.96,17.47) v2(7.35,22.55) v2(7.35,22.14) v2(7.35,21.74) v2(7.35,21.33) v2(7.35,20.92) v2(7.34,13.15) v2(7.42,11.94) v2(7.59,29.41) v2(7.59,28.65) v2(7.59,27.76) v2(7.55,26.9) v2(7.59,25.98) v2(7.55,25.12) v2(7.68,36.04) v2(7.68,35.03) v2(7.68,34.01) v2(7.68,33) v2(7.68,31.98) v2(7.68,30.96) v2(7.76,22.55) v2(7.76,22.14) v2(7.76,21.74) v2(7.76,21.33) v2(7.76,20.92) v2(7.87,6.35) v2(7.85,5.28) v2(8.23,12.9) v2(8.42,24.35) v2(8.42,23.95) v2(8.42,23.54) v2(8.67,32.01) v2(8.67,30.93) v2(8.67,29.92) v2(8.67,28.9) v2(8.67,28.14) v2(8.67,27.38) v2(8.67,26.36) v2(8.67,25.35) v2(8.61,5.28) v2(8.82,24.35) v2(8.82,23.95) v2(8.82,23.54) v2(8.82,23.13) v2(9.23,24.35) v2(9.23,23.95) v2(9.23,23.54) v2(9.23,23.13) v2(9.23,22.73) v2(9.23,22.32) v2(9.23,21.91) v2(9.23,21.51) v2(9.23,21.1) v2(9.64,24.35) v2(9.64,23.95) v2(9.64,23.54) v2(9.64,23.13) v2(9.64,22.73) v2(9.64,22.32) v2(9.64,21.91) v2(9.64,21.51) v2(9.64,21.1) v2(9.75,31.95) v2(9.75,30.93) v2(9.75,29.92) v2(9.75,28.9) v2(9.75,28.14) v2(9.75,27.38) v2(9.75,26.36) v2(9.75,25.35) v2(10.04,24.35) v2(10.04,23.95) v2(10.04,23.54) v2(10.04,23.13) v2(10.04,22.73) v2(10.04,22.32) v2(10.04,21.91) v2(10.04,21.51) v2(10.04,21.1) v2(10.45,24.35) v2(10.45,23.95) v2(10.45,23.54) v2(10.45,23.13) v2(10.45,22.73) v2(10.45,22.32) v2(10.45,21.91) v2(10.45,21.51) v2(10.45,21.1) v2(10.83,35.95) v2(10.83,34.94) v2(10.83,33.92) v2(10.83,32.9) v2(10.83,31.95) v2(10.83,30.93) v2(10.83,29.92) v2(10.83,28.9) v2(10.83,28.14) v2(10.83,27.38) v2(10.83,26.36) v2(10.83,25.35) v2(10.86,24.35) v2(10.86,23.95) v2(10.86,23.54) v2(10.86,23.13) v2(10.86,22.73) v2(10.86,22.32) v2(10.86,21.91) v2(10.86,21.51) v2(10.86,21.1) v2(11.15,11.5) v2(11.15,10.49) v2(11.26,24.35) v2(11.26,23.95) v2(11.26,23.54) v2(11.26,23.13) v2(11.26,22.73) v2(11.26,22.32) v2(11.26,21.91) v2(11.26,21.51) v2(11.26,21.1) v2(11.67,26.89) v2(11.67,26.49) v2(11.67,26.08) v2(11.67,25.67) v2(11.67,25.27) v2(11.67,24.86) v2(11.67,24.45) v2(11.67,24.05) v2(11.67,23.64) v2(11.85,35.95) v2(11.85,34.94) v2(11.85,33.92) v2(11.85,32.9) v2(11.85,31.95) v2(11.85,30.93) v2(11.85,29.92) v2(11.85,28.9) v2(11.85,27.89) v2(11.91,1.22) v2(12.07,26.89) v2(12.07,26.49) v2(12.07,26.08) v2(12.07,25.67) v2(12.07,25.27) v2(12.07,24.86) v2(12.07,24.45) v2(12.07,24.05) v2(12.07,23.64) v2(12.29,22.43) v2(12.29,21.59) v2(12.48,26.9) v2(12.48,26.49) v2(12.48,26.08) v2(12.48,25.67) v2(12.48,25.27) v2(12.48,24.86) v2(12.48,24.45) v2(12.48,24.05) v2(12.48,23.64) v2(12.79,14.67) v2(12.86,35.95) v2(12.86,34.94) v2(12.86,33.92) v2(12.86,32.9) v2(12.86,31.95) v2(12.86,30.93) v2(12.86,29.92) v2(12.86,28.9) v2(12.86,27.89) v2(12.83,13.44) v2(12.83,12.17) v2(13.06,24.2) v2(13.06,23.31) v2(13.06,22.43) v2(13.06,21.59) v2(13.06,20.72) v2(13.18,26.74) v2(13.18,25.47) v2(13.31,1.22) v2(13.88,35.95) v2(13.88,34.94) v2(13.88,33.92) v2(13.88,32.9) v2(13.88,31.95) v2(13.88,30.93) v2(13.88,29.92) v2(13.88,28.9) v2(13.88,27.89) v2(13.94,26.74) v2(13.94,25.47) v2(13.94,24.2) v2(13.94,23.31) v2(13.94,22.43) v2(13.94,21.59) v2(13.94,20.72) v2(14.1,15.98) v2(14.1,14.71) v2(14.1,13.44) v2(14.1,12.17) v2(14.6,1.27) v2(14.83,33.92) v2(14.83,32.9) v2(14.83,31.95) v2(14.83,30.93) v2(14.83,29.92) v2(14.83,28.9) v2(14.83,27.89) v2(14.86,26.73) v2(14.86,25.46) v2(14.86,24.26) v2(14.83,23.31) v2(14.83,22.43) v2(14.83,21.59) v2(14.83,20.72) v2(15.37,14.71) v2(15.37,13.44) v2(15.37,12.17) v2(15.37,10.9) v2(15.37,9.63) v2(15.6,23.31) v2(15.6,22.43) v2(15.6,21.54) v2(15.6,20.77) v2(15.88,1.27) v2(16.36,8.2) v2(16.48,22.43) v2(16.48,21.54) v2(16.64,13.44) v2(16.64,12.17) v2(16.64,10.9) v2(16.64,9.63) v2(16.61,7.06) v2(17.15,1.27) v2(17.37,8.2) v2(17.37,7.06) v2(17.37,6.3) v2(17.37,5.66) v2(17.46,21.82) v2(17.46,21.31) v2(17.46,20.8) v2(17.46,20.3) v2(17.46,19.79) v2(17.96,21.31) v2(17.96,20.8) v2(17.96,20.3) v2(17.96,19.79) v2(18.16,10.16) v2(18.16,8.89) v2(18.26,7.06) v2(18.26,6.3) v2(18.26,5.53) v2(18.47,21.31) v2(18.47,20.8) v2(18.47,20.3) v2(18.47,19.79) v2(18.41,11.43) v2(18.41,3.81) v2(18.41,2.54) v2(18.41,1.27) v2(18.64,14.3) v2(18.98,21.31) v2(18.98,20.8) v2(18.98,20.3) v2(19.02,19.76) v2(19.69,3.81) v2(19.69,2.54) v2(19.69,1.27) v2(19.79,13.54) v2(19.79,12.77) v2(19.79,11.5) v2(20.5,20.04) v2(20.5,19.41) v2(20.93,13.54) v2(20.95,12.7) v2(20.95,11.43) v2(20.98,4.98) v2(20.95,3.81) v2(20.95,2.54) v2(20.95,1.27) v2(21.14,20.04) v2(21.14,19.41) v2(21.18,14.93) v2(21.18,14.3) v2(22.2,13.54) v2(22.2,8.89) v2(22.17,7.9) v2(22.17,7.01) v2(22.23,12.7) v2(22.23,11.43) v2(22.22,10.08) v2(22.22,6.07) v2(22.22,5.03) v2(22.23,3.81) v2(22.23,2.54) v2(22.23,1.27) v2(23.49,13.97) v2(23.49,12.7) v2(23.49,11.43) v2(23.49,10.16) v2(23.49,8.89) v2(23.49,5.08) v2(23.49,3.81) v2(23.49,2.54) v2(23.49,1.27) v2(24.36,14.04) v2(24.36,12.65) v2(24.36,11.38) v2(24.36,10.11) v2(24.49,8.84) v2(24.49,3.88) v2(24.49,2.61) v2(24.49,1.34)
PGND: length 1.1
  BOTTOM w0.356: P1.5 18.39,31.7
  vias: v1(16.48,27.25) v1(16.48,26.24) v1(16.61,25.19) v1(17.25,26.36) v1(17.25,24.71) v1(17.37,27.25) v1(17.37,25.6) v1(17.38,23.95) v1(17.75,23.31) v1(17.88,29.41) v1(18.01,31.38) v1(18.01,24.79) v1(18.16,28.45) v1(18.63,24.2) v1(18.7,22.6) v1(18.92,28.45) v1(19.04,25.22) v1(19.15,31.44) v1(19.79,25.2) v1(21.18,23.69)
ADL5605_DISABLE: length 25.5
  TOP w0.305: R3.1 19.2,12.34 16.1,15.44 v1(16.1,20.14) ; U1.2 6.21,19.24 6.71,18.74 v2(7.09,18.74)
  BOTTOM w0.305: v2(7.09,18.74) 7.09,19.19 C5.1 7.66,19.31 8.6,18.38 U3.4 8.6,17.74 9.12,17.22 10.72,17.22 11.15,17.65 11.15,18.87 12.42,20.14 v1(16.1,20.14)
UNNAMED_3_CAP_I19_N1: length 12.7
  TOP w0.305: v1(15.34,2.87) 14.1,4.11 R7.2 ; v1(20.23,4.84) 20.23,9.79 20.73,10.28 R8.1
  BOTTOM w0.305: C23.1 16.64,4.84 v1(20.23,4.84)
UNNAMED_3_CAP_I23_N1: length 0.8
  TOP w0.305: R6.2 v1(13.34,6.42)
UNNAMED_3_CAP_I30_N1: length 6.3
  BOTTOM w0.305: C21.1 C20.1 11.4,13.07 11.4,14.55 U4.F1
UNNAMED_3_CAP_I36_N1:
  vias: v1(18.14,18.11) v1(18.14,17.47) v1(18.14,16.84) v1(18.77,16.84) v1(19.43,18.16) v1(20.57,18.16) v1(21.14,16.87) v1(21.84,18.16) v1(22.73,19.81) v1(22.73,19.05) v1(22.92,18.22) v1(23.75,17.53) v1(23.81,16.74) v1(23.94,18.41)
UNNAMED_3_CN5P3SHLD_I52_N6: length 15.1
  BOTTOM w0.305: P1.SH3 22.77,34.42 21.27,34.42 20.18,35.51 P1.SH2 19.19,35.51 18.1,34.42 16.43,34.42 16.1,34.74 15.72,34.74 15.72,35.29 P1.SH1
  BOTTOM w0.762: 15.72,34.74 16.36,34.11 16.36,30.57 R4.1
UNNAMED_3_DIOLED_I57_P: length 1.6
  TOP w0.305: R8.2 DS2.A
UNNAMED_3_LINLTM8045_I26_FB: length 4.2
  TOP w0.305: v1(15.09,7.95) 15.06,7.92 R6.1 R7.1
  BOTTOM w0.305: v1(15.09,7.95) 14.73,8.3 U4.A3
UNNAMED_3_LINLTM8045_I26_RT: length 4.8
  BOTTOM w0.305: R5.1 10.26,13.03 10.77,13.54 10.77,15.19 U4.G1
UNNAMED_4_741G126_I114_A: length 9
  BOTTOM w0.305: U2.6 3.4,18.75 4.3,17.84 R1.2 8.1,15.44 8.99,15.44 9.25,15.69 U3.2
UNNAMED_4_741G126_I114_OE: length 1.9
  BOTTOM w0.305: R2.2 9.9,14.53 U3.1
UNNAMED_4_ADT6402_I117_S0: length 9
  BOTTOM w0.305: U2.3 1.5,16.84 0.99,16.33 0.99,11.5 1.37,11.12 2.13,11.12 2.57,10.69 JP1.2
UNNAMED_4_ADT6402_I117_S1: length 5.1
  BOTTOM w0.305: JP2.2 2.57,13.87 1.88,14.55 1.88,15.69 2.45,16.26 U2.2
UNNAMED_4_DIOLED_I108_P: length 1.6
  TOP w0.305: R3.2 DS1.A

## Copper pours and planes (outline as drawn; the poured copper is in the pictures)
5V_SUPPLY on TOP: 6.83,20.27 12.55,20.27 12.55,16.84 12.42,16.71 7.72,16.71 7.47,16.96 7.47,18.61 6.71,19.37 6.71,20.14
5V_SUPPLY on TOP: 0.64,23.4 0.64,26.54 4.72,26.54 5.92,25.35 5.92,24.76 4.98,24.76 3.62,23.41
5V_SUPPLY on BOTTOM: 4.1,20.39 5.92,20.39 6.07,20.24 6.07,19.17 4.88,19.17 4.69,18.98 4.67,19 4.17,19 4,19.16 4,20.29
5V_SUPPLY on BOTTOM: 9.88,17.73 10.01,17.73 10.77,18.49 10.77,20.01 10.52,20.27 8.74,20.27 8.48,20.01 8.48,19.12
5V_SUPPLY on BOTTOM: 11.4,5.41 13.06,5.41 13.31,5.15 13.31,2.49 11.4,2.49 11.15,2.74 11.15,5.15
5V_SUPPLY on BOTTOM: 8.36,15.06 7.21,15.06 7.09,14.93 7.09,13.92 7.21,13.79 8.23,13.79 8.48,14.04 8.48,14.93
5V_SUPPLY on L4_PWR: 0.64,0.63 0.64,29.03 5.18,29.03 8.99,25.22 8.99,22.81 11.91,22.81 11.91,7.62 12.93,6.6 12.93,0.63 ; 1 cut-out
GND on TOP: 4.93,23.06 5.18,22.81 7.85,22.81 8.1,23.06 8.1,24.08 7.37,24.81 7.37,36.96 12.12,36.96 12.12,36.36 15.21,36.36 15.21,24.33 17.88,21.66 21.52,21.66 21.52,19.12 17.63,19.12 17.12,18.62 17.12,16.33 18.26,15.19 24.77,15.19 24.77,0.64 11.09,0.63 11.09,0 6.43,0 6.43,8.4 4.72,8.4 4.72,0 0.48,0 0.48,5.66 0.64,5.66 0.64,23.06 ; 2 cut-outs
GND on TOP: 0.64,27 0.64,36.96 5.69,36.96 5.69,27
GND on BOTTOM: 6.45,20.39 6.07,20.77 0.64,20.77 0.64,36.96 12.12,36.96 12.12,36.36 15.21,36.36 15.21,24.33 17.88,21.66 21.51,21.66 21.51,19.12 16.23,19.12 14.2,17.09 14.2,16.08 15.09,15.19 24.78,15.19 24.77,6.93 24.77,0.63 11.09,0.63 11.09,0.07 0.48,0.07 0.48,5.66 0.64,5.66 0.64,10.89 0.74,11 0.86,11 1.12,10.74 1.12,8.71 1.37,8.46 3.78,8.46 4.04,8.71 4.04,13.79 3.66,14.17 3.15,14.17 2.9,14.42 2.9,14.68 3.02,14.81 3.66,14.81 3.91,15.06 3.91,17.85 6.45,17.85 ; 3 cut-outs
GND on L2_GND: 7.37,36.96 12.12,36.96 12.12,36.33 15.21,36.33 15.21,24.33 17.88,21.66 24.77,21.66 24.77,0.64 11.09,0.63 11.09,0 6.43,0 6.43,20.77 4.72,20.77 4.72,0 0.64,0 0.64,36.96 5.69,36.96 5.69,24.84 5.05,24.2 5.05,22.93 8.1,22.93 8.1,24.08 7.37,24.81
GND on L3_GND, L5_GND: 0.64,0 0.64,36.96 12.12,36.96 12.12,36.33 15.21,36.33 15.21,24.33 17.88,21.66 24.77,21.66 24.77,0.64 11.09,0.63 11.09,0
GND on L4_PWR: 12.42,0.63 12.42,23.31 9.5,23.31 9.5,25.6 5.69,29.41 0.63,29.41 0.63,36.36 15.21,36.36 15.21,24.33 17.88,21.66 24.78,21.66 24.77,0.63
PGND on TOP: 15.98,36.34 24.77,36.34 24.76,22.17 22.15,22.17 18.31,22.17 15.98,24.51
PGND on BOTTOM: 16.61,34.26 16.8,34.26 16.8,32.9 18.96,32.9 18.96,33.6 20.29,33.6 20.29,25.27 21.51,24.05 21.51,22.17 18.31,22.17 15.98,24.51 15.98,29.54 16.61,30.17
PGND on L2_GND, L3_GND, L5_GND: 15.98,36.34 24.76,36.34 24.77,22.17 18.32,22.17 15.98,24.51
PGND on L4_PWR: 15.98,36.34 24.76,36.34 24.76,22.17 18.32,22.17 15.98,24.51
UNNAMED_3_CAP_I19_N1 on BOTTOM: 14.07,2.49 14.07,5.15 16.87,5.15 16.87,2.87 16.48,2.49
UNNAMED_3_CAP_I23_N1 on BOTTOM: 12.04,10.49 13.52,10.49 14.22,9.78 14.22,8.43 15.21,7.44 15.21,6.17 10.39,6.17 9.5,7.06 9.5,8.58 10.13,8.58
UNNAMED_3_CAP_I36_N1 on TOP: 18.39,15.82 24.77,15.82 24.77,21.66 22.15,21.66 22.15,18.49 17.88,18.49 17.63,18.23 17.63,16.58
UNNAMED_3_CAP_I36_N1 on BOTTOM: 14.58,16.33 15.09,15.82 19.46,15.82 19.46,15.82 24.77,15.82 24.77,21.64 22.15,21.64 22.15,18.49 16.1,18.49 14.58,16.96
UNNAMED_3_CAP_I45_N1 on BOTTOM: 20.8,33.79 24.76,33.79 24.76,22.17 22.2,22.17 22.2,24.33 20.93,25.6 20.93,32.02 20.8,32.02
UNNAMED_4_ADL5605_I25_RFOUT1 on TOP (solid shape): 6.76,26.49 6.85,26.26 6.85,26.25 7.51,23.98 7.83,23.66 7.51,23.34 5.56,23.34 5.24,23.66 5.56,23.98 6.22,23.98 6.22,26.26 6.24,26.39 6.31,26.49 6.42,26.56 6.54,26.58
UNNAMED_4_CAP_I29_N1 on TOP (solid shape): 6.74,31.18 6.83,31.07 6.86,30.93 6.86,29.79 6.85,29.79 6.85,27.53 6.56,27.22 6.22,27.49 6.22,30.93 6.25,31.07 6.33,31.17 6.33,31.48 6.74,31.48
UNNAMED_4_CAP_I106_N1 on TOP (solid shape): 5.77,16.49 5.88,16.38 5.88,10.63 5.24,10.63 5.24,16.38 5.36,16.49 5.36,16.8 5.77,16.8
UNNAMED_4_ADL5605_I25_RFIN on TOP (solid shape): 5.38,19.81 5.56,19.99 5.74,19.81 5.74,19.13 5.84,19.02 5.88,18.87 5.88,17.55 5.77,17.43 5.77,17.13 5.36,17.13 5.36,17.43 5.24,17.55 5.24,18.87 5.28,19.02 5.38,19.13
UNNAMED_4_CAP_I17_N2 on TOP (solid shape): 6.22,34.84 6.53,35.15 6.85,34.84 6.85,32.36 6.82,32.22 6.74,32.12 6.74,31.81 6.33,31.81 6.33,32.11 6.25,32.22 6.22,32.36
UNNAMED_4_CNBNC5P_I36_CNTR on TOP (solid shape): 5.88,2.81 5.56,2.49 5.24,2.81 5.24,8.82 5.88,8.82

## Text on the board
Ref Des/Assembly Bottom: 0 | 1 | H | A | 5 | C
Ref Des/Silkscreen Bottom: WARNING: HOT SURFACE | A | C | SECONDARY SIDE | 08-058924 REV B Z
User.Comments: VIEWED FROM THE | PRIMARY SIDE | 4.    PARTS INDICATED BELOW SHOULD BE MOUNTED MANUALLY: | B.    J2, E028678, CONN-PCB EDGE SMA SMALL VERSION, CON-SMA-EDGE-S | A.    J1, E033180, CONN-PCB RCPT PLUG SMA END LAUNCH, 132365-10
Ref Des/Assembly Top: C | A
Ref Des/Silkscreen Top: RFIN | +15dBm MAX | RFOUT | WARNING: HOT SURFACE | EVAL-CN0522-EBZ | PRIMARY SIDE | 08-058924 REV B Z | A | C
DIMENSION: SEE DETAIL A | BOARD DIMENSIONS | ARRAY DRAWING | (REF) | NON-PLATED: +/- 2 MILS | DIA MAX | SEE NOTE 14
PAGE_OUTLINE: 27SEP19 | A1 | B | AS PER ECR-093682 | AS PER ECR-094463 | 05MAR20 | 15APR20 | A. UY | PRIMARY SIDE
User.12: 6.    ASSEMBLY VENDOR MUST SOLDER SHORT THE MIDDLE PIN OF JP1 TO POSITION "0". | 7.    ASSEMBLY VENDOR MUST SOLDER SHORT THE MIDDLE PIN OF JP2 TO POSITION "1".
User.15: L5_GND PLANE    (LAYER 5) | L4_PWR PLANE    (LAYER 4) | 15.    BOARDS TO BE SHIPPED IN ARRAY | 3.5 MILS | 8.5 MILS | 50 OHMS
User.24: L2 GND | 08-      -07
User.25: L3 GND | 08-      -08
User.26: L4 PWR | 08-      -09
User.27: L5 GND
User.45: FIGURE | SIZE | 8.0 | 8.01 | 10.0 | 10.01 | 25.0 | 125.0 | 34.0x26.0 | 51.0x24.0 | DRILL CHART: TOP to BOTTOM | FINISHED HOLES IN MILS | PLATED | NON-PLATED | QTY | 300 | 163 | 80 | 52 | 96 | 4 | 2 | TOLERANCE/NOTES
